# Altium PCB LPRAN.PcbDoc (part 3 of 3)
Units mil, origin at the board's own origin, x right, y up, seen from the top; angles counter-clockwise.
Board outline 3200 x 1800 mil, 4 copper layers (Component Side, Ground Plane, Power Plane, Solder Side), stack 58 mil thick; 140 components, 132 nets, 550 pads, 376 vias.
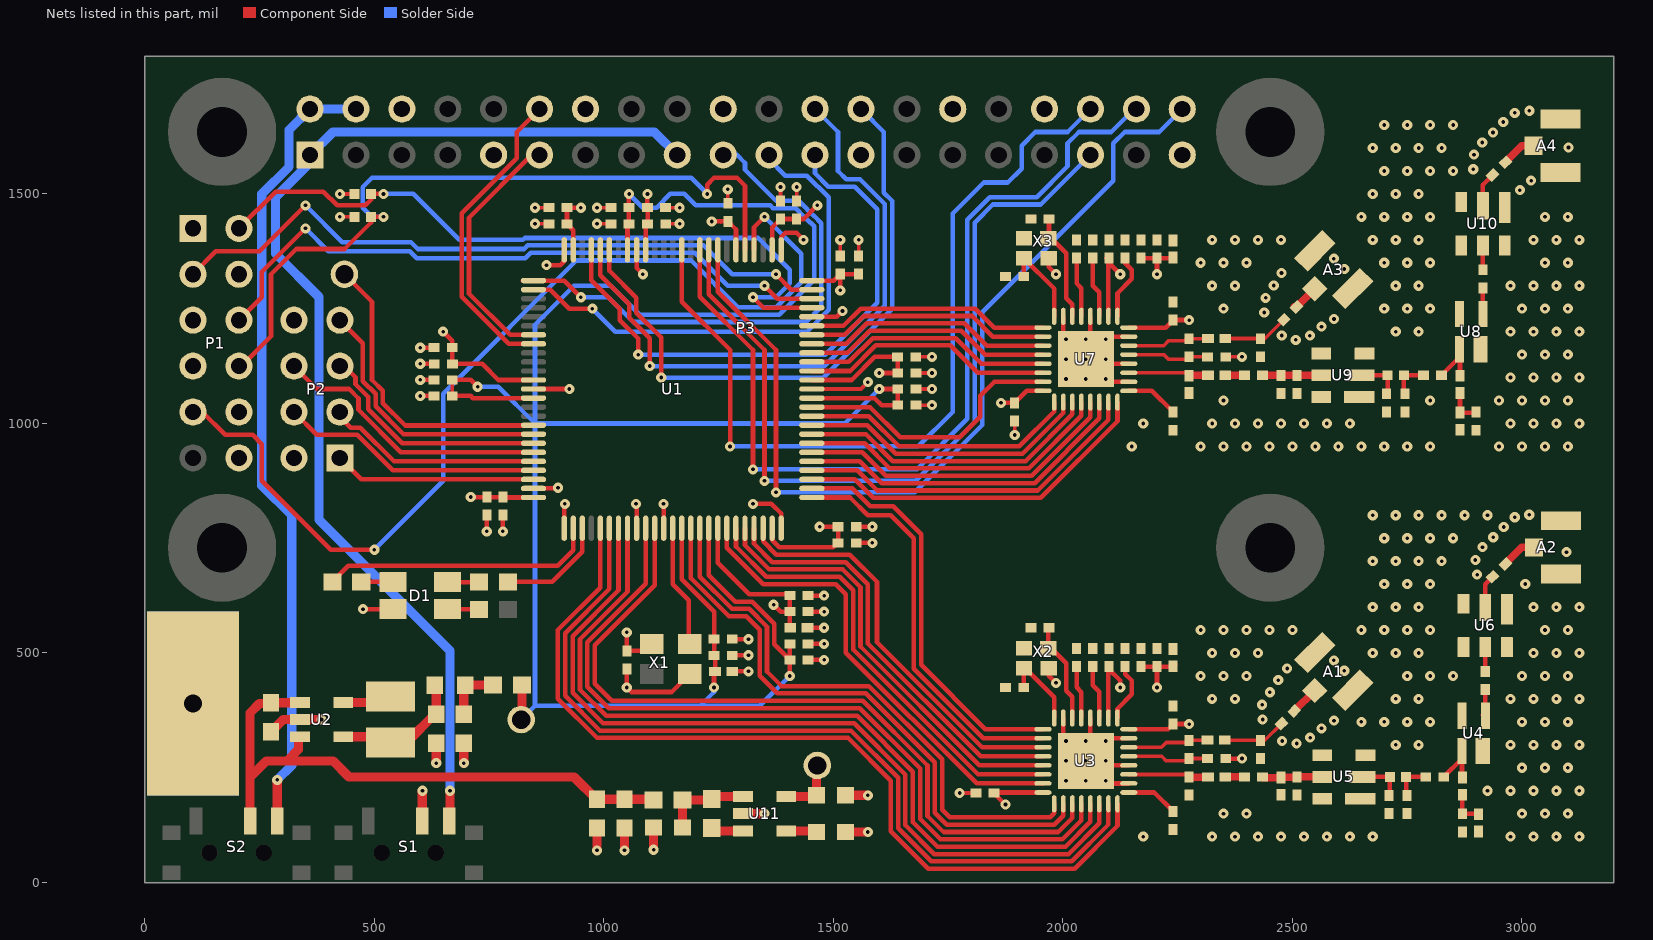
[diagram p4: the nets of this part, all layers, seen from the top]

## Via types
v1: diameter 22, hole 8, Component Side to Solder Side, tented both sides, 242 vias
v2: diameter 22, hole 8, Component Side to Solder Side, 133 vias
v3: diameter 60, hole 40.16, Component Side to Solder Side, tented both sides, 1 vias

## Nets (pads, with @x,y where several pads share a name; then routed paths per layer and width w, separated by ;. In a path a pad name is that pad's centre, name@x,y a point inside that pad or via, vN(x,y) a via of type N, cw(c..) or ccw(c..) an arc to the next point about the centre after c; other vN are vias at no path point) (continued)
DEBUG_0: P2.1 U1.98 | length 441.3
  Component Side w10: P2.1@425,925 471.85,878.15 U1.98@846.85,878.15
DEBUG_1: P2.4 U1.97 | length 574.5
  Component Side w10: P2.4@325,1025 375,975 462.83,975 540,897.83 U1.97@846.85,897.83
DEBUG_2: P2.3 U1.96 | length 472.2
  Component Side w10: P2.3@425,1025 425,1015 449,991 469.46,991 542.94,917.52 U1.96@846.85,917.52
DEBUG_3: P2.6 U1.95 | length 614.3
  Component Side w10: P2.6@325,1125 375,1075 445,1075 465.53,1054.47 465.53,1029.47 557.8,937.2 U1.95@846.85,937.2
DEBUG_4: P2.5 U1.94 | length 516.3
  Component Side w10: P2.5@425,1125 435,1125 459,1101 459,1085.49 486.75,1057.74 486.75,1030.88 560.74,956.89 U1.94@846.85,956.89
DEBUG_5: P2.7 U1.93 | length 589
  Component Side w10: P2.7@425,1225 475,1175 475,1092.12 502.75,1064.37 502.75,1037.5 563.68,976.57 U1.93@846.85,976.57
GND: A1.2 A1.3 A2.2 A2.3 A3.2 A3.3 A4.2 A4.3 C1.1 C2.1 C3.1 C4.1 C5.1 C6.1 C7.1 C8.1 C9.1 C10.1 C11.1 C12.1 C13.1 C14.1 C15.1 C16.1 C17.1 C18.1 C19.1 C20.1 C21.1 C22.1 C23.1 C24.1 C25.1 C26.1 C27.1 C28.1 C29.1 C30.1 C31.1 C32.1 C33.1 C34.1 C35.1 C38.1 C39.2 C41.1 C42.1 C43.1 C44.1 C45.1 C46.1 C47.1 C48.1 C49.1 C50.1 C51.1 C52.1 C53.1 C54.1 C55.1 C56.1 C57.1 C59.1 C63.1 C65.2 C67.1 C68.1 C69.1 C70.1 C71.1 C72.1 C73.1 C74.1 C75.1 C76.1 C77.1 C78.1 C79.1 C80.1 C81.1 C82.1 C86.1 C87.1 C88.1 C89.1 C90.1 C91.1 C92.1 L5.1 L9.1 P1.4 P1.5 P1.12 P2.8 P3.6 P3.9 P3.14 P3.20 P3.25 P3.30 P3.34 P3.39 R1.1 R2.1 TP1.1 U1.1 U1.9 U1.12 U1.25 U1.38 U1.46 U1.51 U1.67 U1.75 U1.88 U1.99 U2.2 U3.4 U3.7 U3.26 U3.28 U3.31 U3.33 U4.2 U4.4 U5.1 U5.3 U5.4 U5.6 U6.1 U6.3 U6.4 U6.6 U7.4 U7.7 U7.26 U7.28 U7.31 U7.33 U8.2 U8.4 U9.1 U9.3 U9.4 U9.6 U10.1 U10.3 U10.4 U10.6 U11.2 X1.2 X2.2 X2.4 X3.2 X3.4 | length 3801.9
  Component Side w8: v2(425,1450) R1.1@457.28,1450 ; v2(425,1500) R2.1@455,1500 ; v2(850,1435) C21.1@880.32,1435 ; v2(850,1470) C29.1@880.32,1470 ; v2(985,1435) C13.1@1015.32,1435 ; v2(985,1470) C8.1@1015.31,1470 ; C20.1@1134.37,1470 v2(1165,1470) ; C28.1@1134.68,1435 v2(1165,1435) ; C1.1@1270,1479.69 v2(1270,1510) ; C2.1@1385,1484.69 v2(1385,1515) ; C3.1@1420,1484.69 v2(1420,1515) ; U1.38@1453.15,1075 1560,1075 v2(1575,1090) ; C19.1@1515,1364.69 v2(1515,1400) ; C27.1@1555,1364.69 v2(1555,1400) ; C26.1@1679.37,1145 v2(1715,1145) ; C7.1@1679.68,1040 v2(1715,1040) ; C12.1@1679.68,1075 v2(1715,1075) ; C18.1@1679.68,1110 v2(1715,1110) ; v2(1775,195) C52.1@1810.32,195 ; v2(1895,975) C75.1@1895,1005.32 ; C65.2@2354.69,1145 v2(2390,1145)
  Component Side w10: v2(600,1060) C9.1@630.32,1060 ; v2(600,1095) C14.1@630.32,1095 ; v2(600,1130) C30.1@630.63,1130 ; v2(600,1165) C22.1@630.32,1165 ; v2(745,765) C23.1@745,800.32 ; v2(780,765) C31.1@780,800.32 ; U1.99@846.85,858.46 898.46,858.46 v2(900,860) ; U1.88@846.85,1075 v2(925,1075) ; v2(875,1345) 905,1345 913.78,1353.78 U1.75@913.78,1378.15 ; U1.1@913.78,771.85 913.78,823.78 v2(915,825) ; C32.1@1050,465.32 v2(1050,425) 1060,415 1147.81,415 X1.2@1187.05,454.24 ; v2(1070,825) 1071.26,823.74 U1.9@1071.26,771.85 ; U1.67@1071.26,1378.15 1071.26,1338.74 v2(1085,1325) ; v2(1130,825) 1130.32,824.68 U1.12@1130.32,771.85 ; C4.1@1279.69,460 v2(1315,460) ; C5.1@1279.68,495 v2(1315,495) ; C10.1@1279.68,530 v2(1315,530) ; v2(1325,825) 1365,825 1386.22,803.78 U1.25@1386.22,771.85 ; U1.51@1386.22,1378.15 1386.22,1406.22 1395,1415 1420,1415 v2(1435,1400) ; C15.1@1443.7,555 v2(1480,555) ; C6.1@1444.68,485 v2(1480,485) ; C11.1@1444.68,520 v2(1480,520) ; C16.1@1444.68,590 v2(1480,590) ; C24.1@1444.68,625 v2(1480,625) ; U1.46@1453.15,1232.48 1507.48,1232.48 v2(1520,1245) ; C17.1@1549.68,740 v2(1585,740) ; C25.1@1549.68,775 v2(1585,775) ; X2.4@1969.13,466.69 1969.13,450.87 v2(1985,435) ; X3.4@1969.13,1360 1969.13,1340.87 v2(1985,1325) ; U3.7@2000.79,358.5 2000.79,270.91 v2(2006.69,265) ; U7.33@2000.79,1189.21 U7.7@2000.79,1233.5 ; v2(2006.69,1183.31) v2(2050,1140) ; U3.4@2059.84,358.5 U3.33@2059.84,274.84 ; U7.4@2059.84,1233.5 U7.33@2059.84,1149.84 ; U3.26@2143.5,215.79 2099.21,215.79 U3.33@2059.84,255.16 ; U3.28@2143.5,255.16 U3.33@2059.84,255.16 ; U3.31@2143.5,314.21 2099.21,314.21 v2(2093.31,308.31) U3.33@2059.84,274.84 ; U7.26@2143.5,1090.79 2099.21,1090.79 U7.33@2059.84,1130.16 ; U7.28@2143.5,1130.16 U7.33@2059.84,1130.16 ; U7.31@2143.5,1189.21 2099.21,1189.21 v2(2093.31,1183.31) U7.33@2059.84,1149.84 ; C39.2@2354.69,270 v2(2390,270) ; C38.1@2429.69,270 C38.1@2430,270.32 ; v2(2050,1140) U7.33@2059.84,1130.16 ; v2(2050,1140) U7.33@2059.84,1149.84 ; U3.33@2059.84,255.16 v2(2050,265) U3.33@2059.84,274.84
  Component Side w20: C33.1@275,328.5 301.5,355 U2.2@335,355 ; U2.2@337.76,355 v2(385,355) ; v2(635,260) C34.1@635,303.5 ; v2(695,260) C35.1@695,303.5 ; v2(985,70) C88.1@985,118.5 ; v2(1045,70) C89.1@1045,118.5 ; v2(1108.5,71.5) C90.1@1108.5,120 ; U11.2@1302.76,150 v2(1350,150) ; C92.1@1526.5,110 v2(1575,110) ; C91.1@1526.5,190 v2(1575,190)
  other v1: 2175,100 2325,100 2375,100 2425,100 2475,100 2525,100 2575,100 2625,100 2675,100 2975,100 3025,100 3075,100 3125,100 2350,150 2400,150 3000,150 3050,150 3100,150 2925,200 2975,200 3025,200 3075,200 3125,200 3000,250 3050,250 3100,250 2725,300 2775,300 2975,300 3025,300 3075,300 3125,300 2509.05,302.98 2477.5,308.36 2538.46,315.59 2563.14,335.96 2650,350 2700,350 2750,350 2800,350 3000,350 3050,350 3100,350 2590.41,352.7 2435.12,355.31 2434.11,387.3 2325,400 2375,400 2725,400 2775,400 2975,400 3025,400 3075,400 3125,400 2450.8,414.6 2469.14,440.82 2300,450 2350,450 2400,450 2750,450 2800,450 2850,450 3000,450 3050,450 3100,450 2612.82,461.38 2488.55,466.27 2590.2,484 2325,500 2375,500 2425,500 2675,500 2725,500 2775,500 3025,500 3075,500 3125,500 2300,550 2350,550 2400,550 2450,550 2500,550 2650,550 2700,550 2750,550 2800,550 3050,550 3100,550 2675,600 2725,600 2775,600 3025,600 3075,600 3125,600 2700,650 2750,650 2800,650 3007.15,650.48 2902.42,670.76 2675,700 2725,700 2775,700 2825,700 2898.48,702.52 3097.07,719.58 2913.9,730.56 2700,750 2750,750 2800,750 2850,750 2937.5,752.17 2960.27,774.65 2984.3,795.79 2675,800 2725,800 2775,800 2825,800 2875,800 2925,800 3015.85,801.13 2150,950 2300,950 2350,950 2400,950 2450,950 2500,950 2550,950 2600,950 2650,950 2700,950 2750,950 2800,950 2950,950 3000,950 3050,950 3100,950 2175,1000 2325,1000 2375,1000 2425,1000 2475,1000 2525,1000 2575,1000 2625,1000 2975,1000 3025,1000 3075,1000 3125,1000 2350,1050 2800,1050 2950,1050 3000,1050 3050,1050 3100,1050 2975,1100 3025,1100 3075,1100 3125,1100 3000,1150 3050,1150 3100,1150 2507.22,1182.17 2537.88,1191.31 2476.67,1191.7 2725,1200 2775,1200 2975,1200 3025,1200 3075,1200 3125,1200 2563.14,1210.96 2590.41,1227.7 2438.53,1241.83 2350,1250 2700,1250 2750,1250 2800,1250 3000,1250 3050,1250 3100,1250 2441.75,1273.67 2325,1300 2375,1300 2725,1300 2775,1300 2975,1300 3025,1300 3075,1300 3125,1300 2459.19,1300.5 2476.19,1327.61 2612.82,1336.38 2300,1350 2350,1350 2400,1350 2700,1350 2750,1350 2800,1350 3050,1350 3100,1350 2590.2,1359 2325,1400 2375,1400 2425,1400 2475,1400 2675,1400 2725,1400 2775,1400 3025,1400 3075,1400 3125,1400 2650,1450 2700,1450 2750,1450 2800,1450 3050,1450 3100,1450 2675,1500 2725,1500 2775,1500 2995.38,1508.23 3019.86,1528.83 2700,1550 2750,1550 2800,1550 2850,1550 2893.95,1553.68 2895.5,1585.64 2675,1600 2725,1600 2775,1600 2825,1600 3101.17,1601.32 2913.38,1612.18 2937.03,1633.73 2700,1650 2750,1650 2800,1650 2850,1650 2959.3,1656.71 2984.36,1676.62 3016.03,1681.17
  other v2: 2006.69,221.69 2050,221.69 2093.31,221.69 2093.31,265 2006.69,308.31 2050,308.31 2006.69,1096.69 2050,1096.69 2093.31,1096.69 2006.69,1140 2093.31,1140 2050,1183.31
  other v3: 105,390
GREEN: R4.2 U1.3 | length 240.1
  Component Side w10: R4.2@791.5,655 887.63,655 953.15,720.52 U1.3@953.15,771.85
HF_CLK_IN: U1.23 U3.11 | length 901.3
  Component Side w10: U1.23@1346.85,771.85 1346.85,743.03 1375.88,714 1536,714 1595,655 1595,523.39 1823.86,294.53 U3.11@1956.5,294.53
HF_CLK_OUT: U1.26 U3.10 | length 887
  Component Side w10: U1.26@1453.15,838.78 1536.22,838.78 1575,800 1625,800 1675,750 1675,466.02 1826.81,314.21 U3.10@1956.5,314.21
HF_DIO0: U1.8 U3.21 | length 1774.5
  Component Side w10: U1.8@1051.57,771.85 1051.57,633.69 948,530.12 948,419.88 1004.88,363 1551.75,363 1673,241.75 1673,131.75 1726.75,78 2005.63,78 2059.84,132.22 U3.21@2059.84,171.5
HF_DIO1: U1.7 U3.22 | length 1827.5
  Component Side w10: U1.7@1031.89,771.85 1031.89,636.63 932,536.75 932,413.25 998.25,347 1545.12,347 1657,235.12 1657,125.12 1720.12,62 2012.25,62 2079.53,129.27 U3.22@2079.53,171.5
HF_DIO2: U1.6 U3.23 | length 1880.5
  Component Side w10: U1.6@1012.2,771.85 1012.2,639.58 916,543.37 916,406.63 991.63,331 1538.49,331 1641,228.49 1641,118.49 1713.49,46 2018.88,46 2099.21,126.33 U3.23@2099.21,171.5
HF_DIO3: U1.5 U3.24 | length 1933.6
  Component Side w10: U1.5@992.52,771.85 992.52,642.52 900,550 900,400 985,315 1531.86,315 1625,221.86 1625,111.86 1706.86,30 2025.51,30 2118.9,123.39 U3.24@2118.9,171.5
HF_I_IN: U1.21 U3.13 | length 960.4
  Component Side w10: U1.21@1307.48,771.85 1307.48,734.89 1360.37,682 1520.37,682 1559,643.37 1559,514.14 1817.98,255.16 U3.13@1956.5,255.16
HF_I_OUT: U1.19 U3.15 | length 1018.3
  Component Side w10: U1.19@1268.11,771.85 1268.11,729.01 1347.12,650 1505,650 1527,628 1527,500.88 1812.04,215.84 1956.44,215.84 U3.15@1956.5,215.79
HF_MISO: U1.15 U3.18 | length 1299.5
  Component Side w10: U1.15@1189.37,771.85 1189.37,663.26 1272.63,580 1310,580 1339.37,550.63 1339.37,450.63 1378,412 1570.63,412 1721,261.63 1721,151.63 1746.63,126 1981,126 2000.79,145.79 U3.18@2000.79,171.5
HF_MOSI: U1.11 U3.19 | length 1675.2
  Component Side w10: U1.11@1110.63,771.85 1110.63,647.49 980,516.86 980,433.14 1017.14,396 1564,396 1705,255 1705,145 1740,110 1990,110 2020.47,140.47 U3.19@2020.47,171.5
HF_NSS: U1.10 U3.20 | length 1729.6
  Component Side w10: U1.10@1090.94,771.85 1090.94,650.44 964,523.49 964,426.51 1010.51,380 1557.37,380 1689,248.37 1689,138.37 1733.37,94 1999,94 2040.16,135.16 U3.20@2040.16,171.5
HF_Q_IN: U1.22 U3.12 | length 930.8
  Component Side w10: U1.22@1327.17,771.85 1327.17,737.83 1367,698 1527,698 1575,650 1575,520.76 1820.92,274.84 U3.12@1956.5,274.84
HF_Q_OUT: U1.20 U3.14 | length 990
  Component Side w10: U1.20@1287.8,771.85 1287.8,731.95 1353.75,666 1513.75,666 1543,636.75 1543,507.51 1815.04,235.47 U3.14@1956.5,235.47
HF_RESET: U1.27 U3.9 | length 887.6
  Component Side w10: U1.27@1453.15,858.46 1541.54,858.46 1580,820 1630,820 1691,759 1691,474 1831.1,333.9 U3.9@1956.5,333.9
HF_RX: C40.2 C42.2 L5.2 U5.5 | length 141
  Component Side w16.4: C40.2@2435,230 2436.3,228.7 L5.2@2475,228.7 ; L5.2@2470,230 2470.31,229.69 C42.2@2510,229.69 ; C42.2@2505,230.33 2565,230.33 U5.5@2565,230
HF_SCK: U1.16 U3.17 | length 1240.6
  Component Side w10: U1.16@1209.06,771.85 1209.06,666.2 1279.25,596 1316.63,596 1355.37,557.26 1355.37,459.63 1387,428 1577.25,428 1737,268.25 1737,158.25 1753.25,142 1972,142 1981.1,151.1 U3.17@1981.1,171.5
LF_CLK_IN: U1.43 U7.11 | length 541.9
  Component Side w10: U1.43@1453.15,1173.43 1527.92,1173.43 1572.49,1218 1785.31,1218 1833.78,1169.53 U7.11@1956.5,1169.53
LF_CLK_OUT: U1.44 U7.10 | length 538.8
  Component Side w10: U1.44@1453.15,1193.11 1524.97,1193.11 1565.86,1234 1802.36,1234 1847.14,1189.21 U7.10@1956.5,1189.21
LF_DIO0: U1.31 U7.21 | length 713.4
  Component Side w10: U1.31@1453.15,937.2 1562.8,937.2 1614,886 1931.87,886 2059.84,1013.97 U7.21@2059.84,1046.5
LF_DIO1: U1.30 U7.22 | length 739.9
  Component Side w10: U1.30@1453.15,917.52 1557.48,917.52 1605,870 1938.5,870 2079.53,1011.03 U7.22@2079.53,1046.5
LF_DIO2: U1.29 U7.23 | length 766.5
  Component Side w10: U1.29@1453.15,897.83 1552.17,897.83 1596,854 1945.13,854 2099.21,1008.08 U7.23@2099.21,1046.5
LF_DIO3: U1.28 U7.24 | length 793
  Component Side w10: U1.28@1453.15,878.15 1546.85,878.15 1587,838 1951.76,838 2118.9,1005.14 U7.24@2118.9,1046.5
LF_I_IN: U1.41 U7.13 | length 548
  Component Side w10: U1.41@1453.15,1134.06 1533.8,1134.06 1585.75,1186 1766.84,1186 1822.68,1130.16 U7.13@1956.5,1130.16
LF_I_OUT: U1.36 U7.15 | length 606.6
  Component Side w10: U1.36@1453.15,1035.63 1579.88,1035.63 1645.51,970 1775,970 1820,1015 1820,1060 1850,1090 ; 1850,1090.79 U7.15@1956.5,1090.79
LF_MISO: U1.34 U7.18 | length 633.9
  Component Side w10: U1.34@1453.15,996.26 1573.99,996.26 1636.25,934 1911.99,934 2000.79,1022.8 U7.18@2000.79,1046.5
LF_MOSI: U1.33 U7.19 | length 660.4
  Component Side w10: U1.33@1453.15,976.57 1571.05,976.57 1629.63,918 1918.62,918 2020.47,1019.85 U7.19@2020.47,1046.5
LF_NSS: U1.32 U7.20 | length 686.9
  Component Side w10: U1.32@1453.15,956.89 1568.11,956.89 1623,902 1925.25,902 2040.16,1016.91 U7.20@2040.16,1046.5
LF_Q_IN: U1.42 U7.12 | length 544.9
  Component Side w10: U1.42@1453.15,1153.74 1530.86,1153.74 1579.12,1202 1778.68,1202 1830.84,1149.84 U7.12@1956.5,1149.84
LF_Q_OUT: U1.40 U7.14 | length 551
  Component Side w10: U1.40@1453.15,1114.37 1536.74,1114.37 1592.37,1170 1755,1170 1814.53,1110.47 U7.14@1956.5,1110.47
LF_RESET: U1.45 U7.9 | length 535.8
  Component Side w10: U1.45@1453.15,1212.8 1522.03,1212.8 1559.24,1250 1808.98,1250 1850.09,1208.9 U7.9@1956.5,1208.9
LF_RX: C66.2 C67.2 C68.2 U9.5 | length 128.5
  Component Side w16.4: C66.2@2434.69,1105 2435,1104.69 C67.2@2475,1104.69 C68.2@2510,1104.69 ; C68.2@2510,1105.33 2562.76,1105.33 U9.5@2562.76,1105
LF_SCK: U1.35 U7.17 | length 607.2
  Component Side w10: U1.35@1453.15,1015.94 1576.94,1015.94 1642.88,950 1905,950 1981.1,1026.1 U7.17@1981.1,1046.5
MCLK: U1.13 X1.3 | length 277.6
  Component Side w10: U1.13@1150,771.85 1150,650 1185,615 X1.3@1185,520 ; X1.3@1187.05,519.2 X1.3@1195,527.15
NetA1_1: A1.1 C36.2 | length 65.2
  Component Side w16.4: C36.2@2503.92,373.92 A1.1@2548.24,418.24 A1.1@2550,420
NetA2_1: A2.1 C61.2 | length 76
  Component Side w16.4: C61.2@2963.92,693.92 3000,730 A2.1@3025,730
NetA3_1: A3.1 C64.2 | length 60.6
  Component Side w16.4: C64.2@2503.92,1253.92 C64.2@2508.92,1253.92 A3.1@2548.24,1293.24
NetA4_1: A4.1 C85.2 | length 76
  Component Side w16.4: C85.2@2963.92,1568.92 3000,1605 A4.1@3025,1605
NetC34_2: C34.2 L1.2 L2.1 U2.4 | length 289.7
  Component Side w20: U2.4@432.24,317.6 L1.2@527.4,317.6 ; L1.2@535,305 570,305 C34.2@635,370 ; L2.1@625,430 635,420 C34.2@635,370 ; C34.2@635,366.5 C34.2@635,370
NetC35_2: C35.2 FB1.2 L2.2 | length 125.2
  Component Side w20: C35.2@695,366.5 L2.2@695,430 ; L2.2@698.27,430 FB1.2@758.5,430 FB1.2@760,430
NetC36_1: C36.1 C38.2 L3.2 | length 139.3
  Component Side w8: L3.2@2352.4,310 2425,310 C38.2@2430,315 ; C38.2@2430,309.69 2439.69,309.69 C36.1@2475,345
NetC37_1: C37.1 C39.1 U3.29 | length 182.8
  Component Side w8: U3.29@2143.5,274.84 2215.16,274.84 2225,265 2270,265 C37.1@2275,270 ; C37.1@2275,270.32 2319.69,270.32 C39.1@2320,270
NetC37_2: C37.2 L3.1 U3.30 | length 181
  Component Side w8: U3.30@2143.5,294.53 2214.53,294.53 2225,305 C37.2@2275,305 ; C37.2@2275,309.69 2319.69,309.69 L3.1@2320,310
NetC40_1: C40.1 L4.2 | length 35.3
  Component Side w16.4: L4.2@2360,230 C40.1@2395.31,230
NetC41_2: C41.2 L4.1 U3.27 | length 171.4
  Component Side w8: U3.27@2143.5,235.47 2274.53,235.47 C41.2@2275,235
  Component Side w16.4: C41.2@2275,229.69 L4.1@2314.69,229.69
NetC44_2: C44.2 U3.25 | length 113.5
  Component Side w10: U3.25@2143.5,196.1 2198.9,196.1 C44.2@2240,155
NetC46_2: C46.2 U3.1 | length 130.6
  Component Side w10: U3.1@2118.9,358.5 2118.9,378.9 2150,410 2150,440 2136.06,453.94 2136.06,468.94 C46.2@2135,470
NetC47_2: C47.2 U3.3 | length 117.5
  Component Side w10: C47.2@2065,470 2065,430 2079.53,415.47 U3.3@2079.53,358.5
NetC48_2: C48.2 U3.5 | length 115.7
  Component Side w10: C48.2@2030,470 2030,425 2040.16,414.84 U3.5@2040.16,358.5
NetC53_2: C53.2 U3.6 X2.1 | length 226.2
  Component Side w10: C53.2@1970,555 1968.15,553.15 X2.1@1968.15,510 1974.85,510 2007,477.85 2007,418 2020,405 U3.6@2020,355
NetC54_2: C54.2 U3.8 X2.3 | length 180.6
  Component Side w10: C54.2@1915,425 X2.3@1915,466.69 ; X2.3@1915,470 1981.1,403.9 U3.8@1981.1,358.5
NetC55_2: C55.2 C56.2 L6.2 | length 77
  Component Side w10: L6.2@2870,191.3 C55.2@2870,149.69 2904.02,149.69 C56.2@2905,148.7
NetC57_2: C57.2 R6.1 U5.2 | length 99.3
  Component Side w10: U5.2@2651.61,230 R6.1@2710,230 ; C57.2@2710,190 2712.28,192.28 R6.1@2712.28,230
NetC58_1: C58.1 C59.2 R6.2 | length 81.3
  Component Side w10: R6.2@2747.72,230 2747.72,192.28 C59.2@2750,190 ; R6.2@2750,230 C58.1@2790.31,230
NetC58_2: C58.2 L6.1 U4.1 | length 116.7
  Component Side w10: C58.2@2829.69,230 U4.1@2869.41,269.72 ; L6.1@2870,230 2869.41,230.59 U4.1@2869.41,269.72 ; U4.1@2870,290 2870,270.31 U4.1@2869.41,269.72
NetC60_1: C60.1 U4.3 | length 57.7
  Component Side w10: U4.3@2915,365 2920,370 C60.1@2920,420.63
NetC60_2: C60.2 U6.5 | length 52.8
  Component Side w10: C60.2@2920,460 U6.5@2920,512.76
NetC61_1: C61.1 U6.2 | length 71.8
  Component Side w10: U6.2@2920,599.37 2920,650 C61.1@2935,665
NetC62_1: C62.1 C65.1 U7.29 | length 176
  Component Side w8: U7.29@2143.5,1149.84 2220.16,1149.84 2230,1140 C62.1@2275,1140 ; C62.1@2275,1145.31 2315,1145.31 C65.1@2315.31,1145
NetC62_2: C62.2 L7.1 U7.30 | length 174.3
  Component Side w8: U7.30@2143.5,1169.53 2219.53,1169.53 2230,1180 2265,1180 C62.2@2270,1185 ; C62.2@2275,1184.69 2315.98,1184.69 L7.1@2316.3,1185
NetC63_2: C63.2 C64.1 L7.2 | length 144.7
  Component Side w8: L7.2@2353.7,1185 2429.69,1185 C63.2@2430,1184.69 2439.69,1184.69 C64.1@2481.08,1226.08
NetC66_1: C66.1 L8.2 | length 41.6
  Component Side w16.4: L8.2@2353.7,1105 C66.1@2395.31,1105
NetC70_2: C70.2 U7.25 | length 115.6
  Component Side w10: U7.25@2143.5,1071.1 2193.9,1071.1 C70.2@2240,1025
NetC72_2: C72.2 U7.1 | length 145.6
  Component Side w10: U7.1@2118.9,1233.5 2118.9,1283.9 2150,1315 2150,1335 2135,1350 C72.2@2135,1360
NetC73_2: C73.2 U7.3 | length 137.5
  Component Side w10: C73.2@2065,1365 C73.2@2065,1360.31 2065,1300 2079.53,1285.47 U7.3@2079.53,1233.5
NetC74_2: C74.2 U7.5 | length 131
  Component Side w10: C74.2@2030,1360.31 2030,1305 2040.16,1294.84 U7.5@2040.16,1233.5
NetC79_2: C79.2 U7.6 X3.1 | length 239.1
  Component Side w10: C79.2@1969.69,1445 1969.69,1405.31 X3.1@1971.69,1403.31 ; X3.1@1975,1400 X3.1@1971.69,1403.31 ; U7.6@2020.47,1233.5 2020.47,1259.44 2007,1272.91 2007,1371.15 1974.85,1403.31 X3.1@1971.69,1403.31
NetC80_2: C80.2 U7.8 X3.3 | length 191.4
  Component Side w10: C80.2@1914.69,1320 1914.69,1354.69 X3.3@1915,1355 ; X3.3@1915,1360 1981.1,1293.9 U7.8@1981.1,1233.5 U7.8@1981.1,1231.1
NetC81_2: C81.2 C82.2 L10.2 | length 78
  Component Side w10: L10.2@2865,1066.3 C82.2@2865,1023.7 2899.02,1023.7 C81.2@2900,1024.69
NetC83_1: C83.1 C87.2 R7.2 | length 83.9
  Component Side w10: C87.2@2745,1064.69 2742.72,1066.97 R7.2@2742.72,1105 C83.1@2785.31,1105
NetC83_2: C83.2 L10.1 U8.1 | length 131.2
  Component Side w10: C83.2@2824.69,1105 2864.41,1144.72 U8.1@2864.41,1161.61 2865,1161.02 L10.1@2865,1103.7
NetC84_1: C84.1 U8.3 | length 57.2
  Component Side w10: C84.1@2915,1295.31 2915,1238.98 U8.3@2915.59,1238.39
NetC84_2: C84.2 U10.5 | length 53.1
  Component Side w10: C84.2@2915,1334.69 U10.5@2915,1387.76
NetC85_1: C85.1 U10.2 | length 75.4
  Component Side w10: U10.2@2915,1474.37 2915,1520 C85.1@2936.08,1541.08
NetC86_2: C86.2 R7.1 U9.2 | length 99.2
  Component Side w10: U9.2@2649.37,1105 R7.1@2707.28,1105 2707.28,1066.97 C86.2@2705,1064.69
NetC90_2: C90.2 FB2.2 R8.2 U11.1 | length 194.3
  Component Side w20: C90.2@1171.5,120 FB2.2@1171.5,180 1233.5,180 R8.2@1235,181.5 1240.91,187.4 U11.1@1302.76,187.4
NetC92_2: C92.2 U11.4 | length 67.3
  Component Side w20: U11.4@1397.24,112.6 1460.91,112.6 C92.2@1463.5,110
NetD1_1: D1.1 R3.2 | length 69.6
  Component Side w10: R3.2@471.5,655 540.47,655 D1.1@540.94,654.53
NetD1_3: D1.3 R5.1 | length 69.6
  Component Side w10: D1.3@659.06,595.47 728.03,595.47 R5.1@728.5,595
NetD1_4: D1.4 R4.1 | length 69.6
  Component Side w10: D1.4@659.06,654.53 728.03,654.53 R4.1@728.5,655
NetJ1_1: J1.1 U1.92 | length 664.1
  Component Side w10: J1.1@435,1325 495,1265 495,1094.75 518.75,1071 518.75,1044.13 567.38,995.5 846.09,995.5 U1.92@846.85,996.26
NetL1_1: L1.1 U2.5 | length 128
  Component Side w20: U2.5@432.24,392.4 542.4,392.4 L1.1@555,405
NetL8_1: L8.1 L9.2 U7.27 | length 176
  Component Side w8: U7.27@2143.5,1110.47 2274.53,1110.47 L9.2@2275,1110 ; L9.2@2273.23,1105.47 L9.2@2275,1103.7
  Component Side w16.4: L9.2@2275,1103.7 2276.3,1105 L8.1@2316.3,1105
NetR8_1: R8.1 U11.3 | length 70.2
  Component Side w20: R8.1@1235,118.5 1240.91,112.6 U11.3@1302.76,112.6
RED: R3.1 U1.2 | length 601.7
  Component Side w10: R3.1@408.5,655 443.5,690 900,690 933.46,723.46 U1.2@933.46,771.85
RPI_3V3: P3.1 P3.17 S1.1 | length 2481.6
  Component Side w20: S1.1@663.58,133.9 665,135.31 v2(665,200)
  Solder Side w20: v2(665,200) 665,505 379.47,790.53 379.47,1275.53 285,1370 285,1493.23 360,1568.23 P3.1@360,1585 410,1635 1110,1635 P3.17@1160,1585
RPI_5V: P3.2 P3.4 S2.1 | length 1734.5
  Component Side w20: S2.1@288.58,133.9 v2(288.58,223.58)
  Solder Side w20: v2(288.58,223.58) 320,255 320,800 255,865 255,1500 314.47,1559.47 314.47,1639.47 P3.2@360,1685 P3.4@460,1685
RPI_SPI0_CS0: P3.24 U1.71 | length 1373
  Component Side w10: U1.71@992.52,1378.15 992.52,1322.48 1055,1260 1055,1230.25 1100,1185.25 v2(1100,1125)
  Solder Side w10: v2(1100,1125) 1480.25,1125 1612,1256.75 1612,1478 1558,1532 1528,1532 1510,1550 1510,1635 P3.24@1460,1685
RPI_SPI0_CS1: P3.26 U1.70 | length 1351
  Component Side w10: U1.70@1012.2,1378.15 1012.2,1332.8 1071,1274 1071,1241.37 1125,1187.37 v2(1125,1100)
  Solder Side w10: v2(1125,1100) 1477.88,1100 1628,1250.12 1628,1484.63 1610,1502.63 1610,1635 1565,1680 P3.26@1565,1685
RPI_SPI0_MISO: P3.21 U1.77 | length 1119.9
  Component Side w10: U1.77@846.85,1291.54 883.46,1291.54 925,1250 v2(975,1250)
  Solder Side w10: v2(975,1250) 1025,1200 1442.63,1200 1490,1247.37 1490,1492.37 1442.37,1540 1395,1540 1360,1575 P3.21@1360,1585
RPI_SPI0_MOSI: P3.19 U1.76 | length 1168.4
  Component Side w10: U1.76@823.78,1311.22 U1.76@846.85,1311.22 913.78,1311.22 v2(950,1275)
  Solder Side w10: v2(950,1275) 1010,1275 1064,1221 1441,1221 1474,1254 1474,1436 1457,1453 1455.89,1453 1443,1465.89 1443,1467 1425,1485 1375,1485 1307.5,1552.5 1307.5,1567.5 1290,1585 P3.19@1260,1585
RPI_SPI0_SCK: P3.23 U1.72 | length 1250.1
  Component Side w10: U1.72@972.83,1378.15 972.83,1312.17 1035,1250 1035,1225 1075,1185 v2(1075,1150)
  Solder Side w10: v2(1075,1150) 1482.63,1150 1596,1263.37 1596,1466.63 1546.63,1516 1489,1516 1460,1545 P3.23@1460,1585
RPI_SPI1_CS0: P3.12 U1.83 | length 678.1
  Component Side w10: U1.83@846.85,1173.43 793.18,1173.43 690.32,1276.29 690.32,1458 810,1577.69 810,1635 P3.12@860,1685
RPI_SPI1_CS1: P3.11 U1.82 | length 553.2
  Component Side w10: U1.82@846.85,1193.11 796.13,1193.11 706.32,1282.92 706.32,1447.94 843.38,1585 P3.11@860,1585
RPI_SPI1_CS2: P3.36 U1.62 | length 1843.8
  Component Side w10: U1.62@1169.68,1378.15 1169.68,1265.31 1275,1160 v2(1275,950)
  Solder Side w10: v2(1275,950) 1685,950 1760,1025 1760,1457.37 1827.63,1525 1880,1525 1910,1555 1910,1605 1940,1635 2010,1635 P3.36@2060,1685
RPI_SPI1_MISO: P3.35 U1.59 | length 1811.8
  Component Side w10: U1.59@1228.74,1378.15 1228.74,1281.26 1350,1160 v2(1350,875)
  Solder Side w10: v2(1350,875) 1679.75,875 1808,1003.25 1808,1437.49 1847.51,1477 1952,1477 P3.35@2060,1585
RPI_SPI1_MOSI: P3.38 U1.60 | length 1965
  Component Side w10: U1.60@1209.06,1378.15 1209.06,1275.94 1325,1160 v2(1325,900)
  Solder Side w10: v2(1325,900) 1682.12,900 1792,1009.88 1792,1444.12 1840.88,1493 1943,1493 2010,1560 2010,1610 2035,1635 2105,1635 P3.38@2155,1685
RPI_SPI1_SCK: P3.40 U1.58 | length 2003.2
  Component Side w10: U1.58@1248.43,1378.15 1248.43,1286.57 1375,1160 v2(1375,850)
  Solder Side w10: v2(1375,850) 1677.37,850 1824,996.63 1824,1242.47 2110,1528.47 2110,1610 2135,1635 2210,1635 P3.40@2260,1685
TCK: P1.2 R2.2 U1.47 | length 1594.8
  Component Side w10: P1.2@205,1425 285,1505 388.89,1505 418.89,1475 480,1475 492.72,1487.72 R2.2@492.72,1500 v2(520,1500) ; v2(1325,1275) 1347.83,1252.17 U1.47@1453.15,1252.17
  Solder Side w10: v2(520,1500) 585,1500 685,1400 823.63,1400 827.63,1404 1336,1404 1405,1335 1405,1305 1375,1275 v2(1325,1275)
TDI: P1.6 U1.48 | length 1436.6
  Component Side w10: P1.6@205,1225 255,1275 255,1330 v2(350,1425) ; v2(1350,1300) 1378.15,1271.85 U1.48@1453.15,1271.85
  Solder Side w10: v2(350,1425) 400,1375 577.37,1375 592.37,1360 828.89,1360 840.89,1372 1198,1372 1270,1300 v2(1350,1300)
TDO: P1.9 U1.54 | length 2190.2
  Component Side w10: P1.9@105,1025 125,1025 175,975 235,975 255,955 255,875 405,725 v2(500,725) ; U1.54@1327.17,1378.15 1327.17,1427.17 v2(1350,1450)
  Solder Side w10: v2(500,725) 650,875 650,1065 940,1355 1190,1355 1292,1253 1375.63,1253 1430,1307.37 1430,1370 v2(1350,1450)
TMS: P1.3 U1.49 | length 1492.9
  Component Side w10: P1.3@105,1325 155,1375 250,1375 v2(350,1475) ; v2(1375,1325) 1408.46,1291.54 U1.49@1453.15,1291.54
  Solder Side w10: v2(350,1475) 430,1395 580,1395 595,1380 826.26,1380 834.26,1388 1217,1388 1280,1325 v2(1375,1325)
TRST: P1.8 R1.2 U1.55 | length 1667.3
  Component Side w10: P1.8@205,1125 210,1125 275,1190 275,1325 330,1380 435,1380 492.72,1437.72 R1.2@492.72,1450 v2(520,1450) v2@525,1450 ; v2(1225,1500) 1225,1520 1240,1535 1290,1535 1307.48,1517.52 U1.55@1307.48,1378.15
  Solder Side w10: v2(520,1450) 495,1450 475,1470 475,1515 495,1535 1190,1535 v2(1225,1500)
VCC: C1.2 C2.2 C3.2 C15.2 C16.2 C17.2 C18.2 C19.2 C20.2 C21.2 C22.2 C23.2 C24.2 C25.2 C26.2 C27.2 C28.2 C29.2 C30.2 C31.2 C32.2 D1.2 P1.7 P1.10 P2.2 S1.3 U1.18 U1.24 U1.39 U1.50 U1.52 U1.56 U1.66 U1.74 U1.87 U1.100 X1.4 | length 2190.2
  Component Side w10: v2(475.47,595.47) D1.2@540.94,595.47 ; v2@604.53,199.53 v2(605,200) ; v2(650,1200) 669.69,1180.31 C22.2@669.69,1165 ; C22.2@670,1160 C30.2@670,1130 735,1130 770.32,1094.68 U1.87@846.85,1094.68 ; v2(710,840) 710.31,839.69 C23.2@745,839.69 ; C23.2@750.31,839.69 C31.2@780,839.69 ; C31.2@786.22,838.78 U1.100@846.85,838.78 ; U1.74@933.46,1378.15 933.46,1421.22 C21.2@919.69,1435 C29.2@919.69,1470 v2(950,1470) ; v2(1050,545) C32.2@1050,504.69 1089.86,504.69 X1.4@1104.37,519.2 ; U1.66@1090.94,1378.15 1090.94,1430.63 C28.2@1095.31,1435 1095.31,1469.69 C20.2@1095,1470 v2(1095,1500) ; v2@1235.31,1440.31 1255.31,1440.31 ; U1.18@1248.43,771.85 1248.43,696.57 1317,628 1402,628 C24.2@1405,625 ; 1255,1440 1255.31,1440.31 ; U1.56@1287.8,1378.15 1287.8,1422.52 C1.2@1270,1440.31 1255.31,1440.31 ; U1.24@1366.54,771.85 1366.54,745.97 1382.51,730 1500,730 C17.2@1510,740 ; U1.52@1366.54,1378.15 1366.54,1426.85 C2.2@1385,1445.31 C3.2@1420,1445.31 1435.31,1445.31 v2(1465,1475) ; v2(1370,605) 1385,590 1405,590 1405.31,590.31 C24.2@1405.31,625 ; C15.2@1405,560 1405.31,560.31 C16.2@1405.31,590 ; U1.39@1453.15,1094.68 1539.68,1094.68 1590,1145 C26.2@1635,1145 ; U1.50@1453.15,1311.22 1501.22,1311.22 C19.2@1515,1325 ; v2(1470,775) C25.2@1510,775 ; C17.2@1510.31,740 1510.31,774.69 C25.2@1510,775 ; C25.2@1510.31,775 C25.2@1510,775 ; v2(1515,1290) C19.2@1515,1325 ; C27.2@1555,1325 1554.69,1325.31 C19.2@1515,1325.31 C19.2@1515,1325 ; v2(1600,1110) C18.2@1640.31,1110 C26.2@1640.31,1144.69
  Component Side w20: S1.3@604.53,133.9 v2@604.53,199.53
  other v2: 1235,1440
VCC_1V5: C4.2 C5.2 C6.2 C7.2 C8.2 C9.2 C10.2 C11.2 C12.2 C13.2 C14.2 FB1.1 J2.1 U1.14 U1.17 U1.37 U1.68 U1.89 | length 5293.3
  Component Side w8: C9.2@669.69,1065.31 C14.2@669.69,1095
  Component Side w10: C9.2@669.69,1060 C9.2@669.69,1065.31 ; C14.2@669.69,1095 710,1095 v2(725,1080) ; C9.2@670,1060 710,1060 714.68,1055.32 U1.89@846.85,1055.32 ; U1.68@1051.57,1378.15 1051.57,1431.89 C13.2@1054.69,1435 C8.2@1054.68,1470 1054.68,1504.69 1055,1504.37 v2(1055,1499.69) ; U1.14@1169.68,771.85 1169.68,660.32 1240.31,589.69 C10.2@1240.31,530 ; U1.17@1228.74,771.85 1228.74,669.14 1285.88,612 1323.25,612 1371.37,563.88 1371.37,518.63 1405,485 1405.32,485.32 C11.2@1405.32,520 ; v2(1240,425) 1240,457.72 C4.2@1242.28,460 1242.28,492.72 C5.2@1240,495 ; C5.2@1240.31,495 1240.31,520.31 C10.2@1245,525 ; v2(1405,450) 1405.31,450.31 C6.2@1405.31,485 ; U1.37@1453.15,1055.32 1589.68,1055.32 1605,1040 1640,1040 1640.31,1040.31 C12.2@1640.31,1075 v2(1600,1075)
  Component Side w20: J2.1@820,355 821.5,356.5 FB1.1@821.5,430
  Solder Side w10: v2(725,1080) 770,1080 850,1000 ; J2.1@820,355 850,385 ; v2(1055,1499.69) 1084.68,1470 1115,1470 1145,1500 1175,1500 1200,1475 1362.37,1475 1368.37,1469 1418.37,1469 1427,1460.37 1427,1459.26 1449.26,1437 1450.37,1437 1458,1429.37 1458,1312.75 1382.25,1237 1078,1237 1015,1300 935,1300 850,1215 850,1000 ; 1215,390 1240,415 v2(1240,425) ; v2(1405,450) 1340,385 850,385 ; v2(1600,1075) 1525,1000 850,1000 ; 850,385 850,1000
VCC_RDO: C43.2 C45.2 C49.2 C50.2 C51.2 C52.2 C69.2 C71.2 C75.2 C76.2 C77.2 C78.2 C91.2 J3.1 U3.2 U3.16 U3.32 U7.2 U7.16 U7.32 U11.5 | length 1232
  Component Side w10: C91.2@1460.91,187.4 C91.2@1463.5,190 ; J3.1@1463.5,263.5 J3.1@1465,265 ; C52.2@1849.69,195 1874.69,170 v2(1875,170) ; C52.2@1850,195 1851.1,196.1 U3.16@1956.5,196.1 ; v2(1865,1045) 1865.31,1044.69 C75.2@1895,1044.69 C75.2@1895.16,1044.84 ; C75.2@1895,1045 1921.1,1071.1 U7.16@1956.5,1071.1 ; C71.2@2095,1360 2099.21,1355.79 U7.2@2099.21,1233.5 ; U3.2@2099.21,358.5 2099.21,469.21 C45.2@2100,470 ; C45.2@2100,470.31 C45.2@2100,470 ; C71.2@2100,1360.31 2100,1350 v2(2125,1325) ; v2(2125,425) 2125,440 2100,465 C45.2@2100,470 ; U3.32@2143.5,333.9 2228.9,333.9 C43.2@2240,345 ; U7.32@2143.5,1208.9 2223.9,1208.9 C69.2@2240,1225 ; C49.2@2170,470.31 C50.2@2205,470.31 ; C76.2@2170,1360.31 2204.69,1360.31 C77.2@2205,1360 ; v2(2205,425) C50.2@2205,470.31 ; v2(2205,1325) C77.2@2205,1360 ; C43.2@2240,345.31 2274.69,345.31 v2(2275,345) ; C69.2@2240,1225.31 2274.69,1225.31 v2(2275,1225) ; C78.2@2240,1360 2239.69,1360.31 C77.2@2205,1360.31 C77.2@2205,1360 ; C51.2@2245,475 2240.31,470.31 C50.2@2205,470.31
  Component Side w20: U11.5@1397.24,187.4 C91.2@1460.91,187.4 ; C91.2@1463.5,190 J3.1@1463.5,263.5
VJTAGENB: P1.1
VSS: C33.2 C88.2 C89.2 FB2.1 S2.3 U2.1 U2.3 | length 1348.6
  Component Side w20: S2.3@229.53,133.9 229.53,229.53 ; C33.2@275,390 250,390 229.53,369.53 229.53,229.53 ; C33.2@275,391.5 338.5,391.5 U2.1@340,390 ; C33.2@277.5,387.5 C33.2@280,390 ; U2.3@335,315 335,290 310,265 ; C88.2@985,180 935,230 445,230 410,265 310,265 ; C88.2@985,181.5 C89.2@1045,181.5 1107.01,181.5 FB2.1@1108.5,180 ; 229.53,229.53 265,265 310,265
pads on no net: P1.11 P3.0 P3.27 S1.2 S1.4 S1.5 S1.6 S1.7 S1.8 S1.9 S2.2 S2.4 S2.5 S2.6 S2.7 S2.8 S2.9 U1.53 X1.1 X1.5 X2.5 X3.5

## Polygon pours and split planes (outlines as drawn)
GND on Solder Side "GND_L04_P010" (solid, remove dead copper, pour order 10): 1825,600 2625,600 2625,850 3175,850 3175,25 1825,25
GND on Solder Side "GND_L04_P000" (solid, remove dead copper, pour order 0): 1825,1475 2625,1475 2625,1725 3175,1725 3175,900 1825,900
GND on Component Side "GND_L01_P008" (solid, remove dead copper, pour order 8): 1825,600 2625,600 2625,850 3175,850 3175,25 1825,25
GND on Component Side "GND_L01_P002" (solid, remove dead copper, pour order 2): 1825,1475 2625,1475 2625,1725 3175,1725 3175,900 1825,900
GND on Ground Plane (split plane): 3179.9,895.1 1800,895.1 1796.08,894.71 1792.31,893.57 1788.83,891.71 1785.79,889.21 1783.29,886.17 1781.43,882.69 1780.29,878.92 1779.9,875 1780.29,871.08 1781.43,867.31 1783.29,863.83 1785.79,860.79 1788.83,858.29 1792.31,856.43 1796.08,855.29 1800,854.9 3179.9,854.9 3179.9,20.1 20.1,20.1 20.1,1779.9 3179.9,1779.9
VCC_RDO on Power Plane (split plane): 3179.9,20.1 1170.1,20.1 1170.1,304.9 1800,304.9 1803.92,305.29 1807.69,306.43 1811.17,308.29 1814.21,310.79 1816.71,313.83 1818.57,317.31 1819.71,321.08 1820.1,325 1820.1,1479.9 2600,1479.9 2603.92,1480.29 2607.69,1481.43 2611.17,1483.29 2614.21,1485.79 2616.71,1488.83 2618.57,1492.31 2619.71,1496.08 2620.1,1500 2620.1,1779.9 3179.9,1779.9
VCC on Power Plane (split plane): 2579.9,1520.1 1800,1520.1 1796.08,1519.71 1792.31,1518.57 1788.83,1516.71 1785.79,1514.21 1783.29,1511.17 1781.43,1507.69 1780.29,1503.92 1779.9,1500 1779.9,345.1 1150,345.1 1146.08,344.71 1142.31,343.57 1138.83,341.71 1135.79,339.21 1133.29,336.17 1131.43,332.69 1130.29,328.92 1129.9,325 1129.9,20.1 20.1,20.1 20.1,1779.9 2579.9,1779.9

## Keep-outs
Keep-Out Layer:
  lines w10: 3200,-5 3200,1795 ; 3200,0 0,0 0,1800 3200,1800

## Other copper
Ground Plane (plane layer: these items are gaps in the copper):
  lines w40: 1800,875 3200,875
Power Plane (plane layer: these items are gaps in the copper):
  lines w40: 1150,0 1150,325 1800,325 1800,1500 2600,1500 2600,1800

## Silkscreen, mask and mechanical layers (free items; w line width, h text height)
Top Overlay:
  text "LPRAN MkI" at 1850,750 h60
  text "Anh Luong" at 1850,700 h60
  text "09/23/2017" at 1850,650 h60
Mechanical 3:
  lines w10: 3200,-5 3200,1795 ; 3200,0 0,0 0,1800 3200,1800

## Dimensions
0,0 to 3200,0 on Mechanical 15
0,0 to 0,1800 on Mechanical 15

## Text inside footprints (layer, text, board x,y; h text height)
P3: Mechanical 1 "USB" at 2080.86,610 h59.06; Mechanical 1 "USB" at 1578.63,613.03 h59.06; Mechanical 1 "HDMI" at 376.31,613.85 h78.74; Mechanical 1 "SD Card" at 52.73,1461.12 h59.06 r270